# EAGLE board Electronics_Design_V2_v11 (EAGLE 9.7.0)
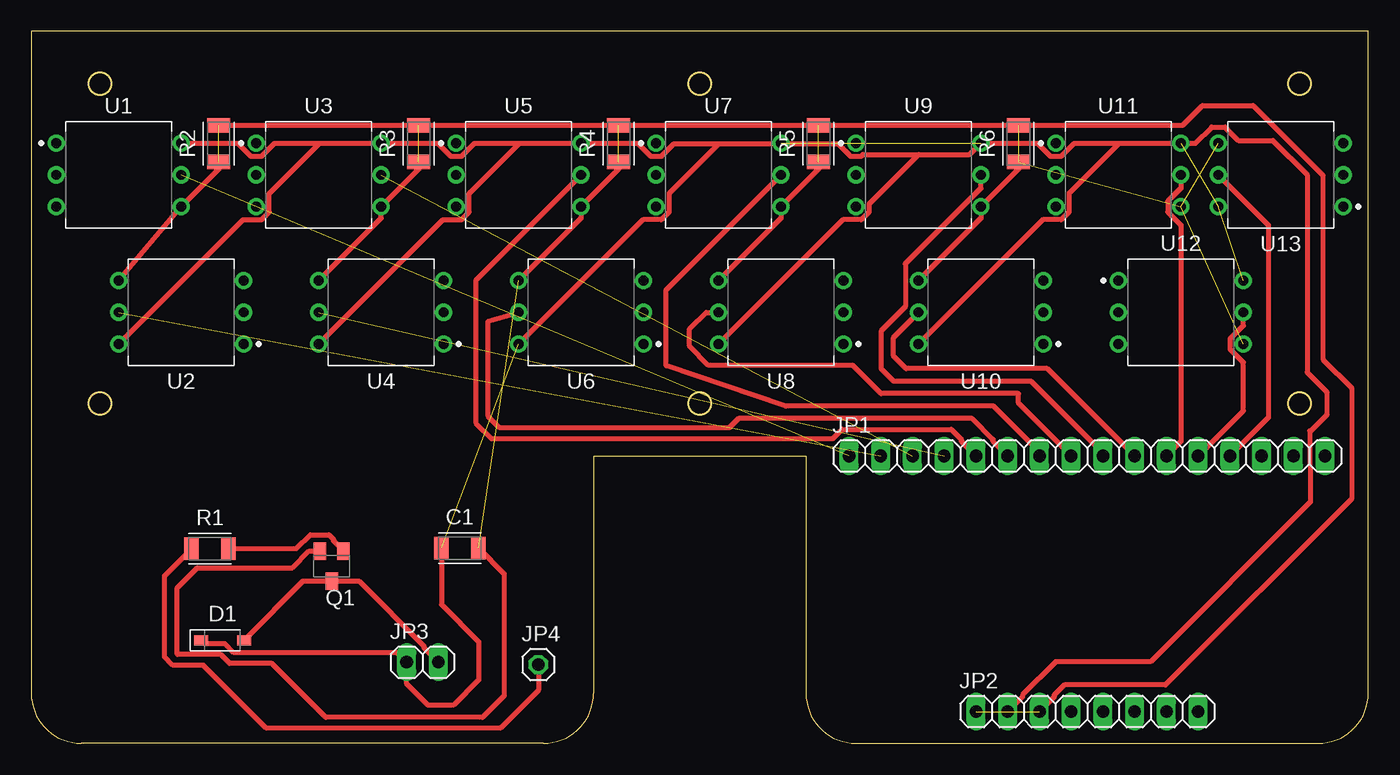
[diagram p0: board, top side]

Size 107 x 57 mm. Coordinates in mm from the lower left corner, seen from the top.
Outline: 45,23 62,23 62,4 arc90 66,0 103,0 arc90 107,4 107,57 0,57 0,4 arc90 4,0 41,0 arc90 45,4 45,23
Outline: circle at 101.5,52.8 radius 0.9
Outline: circle at 53.5,27.2 radius 0.9
Outline: circle at 101.5,27.2 radius 0.9
Outline: circle at 5.5,52.8 radius 0.9
Outline: circle at 5.5,27.2 radius 0.9
Outline: circle at 53.5,52.8 radius 0.9
Copper layers (1*16): Top 0.035mm / dielectric 1.5mm / Bottom 0.035mm
Design rules "default *": minimum track width 6mil, minimum drill 0.35mm, track to track 0.45mm, track to pad 0.4mm, pad to pad 0.4mm, via to via 0.4mm, smd to smd 0.4mm, copper to edge 40mil, drill to drill 6mil, minimum pad ring 10mil, minimum via ring 8mil, stop-mask expansion 4mil, vias tented up to drill 0mil, thermal gap 10mil

## Footprints (pad centres in the part's own frame; a part is rotated, then mirrored left to right if it is on the bottom)
CAPC3216X135 = smd 1.165 x 1.815: 1 -1.475,0; 2 1.475,0
SOD3715X135 = smd 1.127 x 0.784: 1 -1.722,0; 2 1.722,0
1X16 = drill 1.016 long: 1 -19.05,0; 2 -16.51,0; 3 -13.97,0; 4 -11.43,0; 5 -8.89,0; 6 -6.35,0; 7 -3.81,0; 8 -1.27,0; 9 1.27,0; 10 3.81,0; 11 6.35,0; 12 8.89,0; 13 11.43,0; 14 13.97,0; 15 16.51,0; 16 19.05,0
1X08 = drill 1.016 long: 1 -8.89,0; 2 -6.35,0; 3 -3.81,0; 4 -1.27,0; 5 1.27,0; 6 3.81,0; 7 6.35,0; 8 8.89,0
1X02 = drill 1.016 long: 1 -1.27,0; 2 1.27,0
1X01 = drill 1.016 octagon: 1 0,0
SC59 = smd 1 x 1.4: B -0.95,-1.2; C 0,1.2; E 0.95,-1.2
RESC3216X70 = smd 1.165 x 1.815: 1 -1.475,0; 2 1.475,0
DIP1000W53P254L850H340Q6B = drill 0.774 pad 1.374: 1 -5,2.54; 2 -5,0; 3 -5,-2.54; 4 5,-2.54; 5 5,0; 6 5,2.54

## Placement (x,y rotation side)
C1  [CAPC3216X135]  34.31,15.63 0 top
D1  1N4148W  [SOD3715X135]  15.31,8.25 0 top
JP1  PINHD-1X16  [1X16]  84.5,23 0 top
JP2  PINHD-1X8  [1X08]  84.5,2.54 0 top
JP3  PINHD-1X2  [1X02]  31.31,6.49 0 top
JP4  PINHD-1X1  [1X01]  40.58,6.3 0 top
Q1  NPN  [SC59]  24.04,14.19 180 top
R1  [RESC3216X70]  14.31,15.57 0 top
R2  [RESC3216X70]  15,48 90 top
R3  [RESC3216X70]  31,48 90 top
R4  [RESC3216X70]  47,48 90 top
R5  [RESC3216X70]  63,48 90 top
R6  [RESC3216X70]  79,48 90 top
U1  MPC15  [DIP1000W53P254L850H340Q6B]  7,45.5 0 top
U2  MPC15  [DIP1000W53P254L850H340Q6B]  12,34.5 180 top
U3  MPC15  [DIP1000W53P254L850H340Q6B]  23,45.5 0 top
U4  MPC15  [DIP1000W53P254L850H340Q6B]  28,34.5 180 top
U5  MPC15  [DIP1000W53P254L850H340Q6B]  39,45.5 0 top
U6  MPC15  [DIP1000W53P254L850H340Q6B]  44,34.5 180 top
U7  MPC15  [DIP1000W53P254L850H340Q6B]  55,45.5 0 top
U8  MPC15  [DIP1000W53P254L850H340Q6B]  60,34.5 180 top
U9  MPC15  [DIP1000W53P254L850H340Q6B]  71,45.5 0 top
U10  MPC15  [DIP1000W53P254L850H340Q6B]  76,34.5 180 top
U11  MPC15  [DIP1000W53P254L850H340Q6B]  87,45.5 0 top
U12  MPC15  [DIP1000W53P254L850H340Q6B]  92,34.5 0 top
U13  MPC15  [DIP1000W53P254L850H340Q6B]  100,45.5 180 top

## Library data of the parts
C1 = Capacitor; CATEGORY: Capacitor
D1 = Diode; CATEGORY: Diode; DESCRIPTION: DIODE GEN PURP 100V 300MA SOD123; MANUFACTURER: Diodes Incorporated; SUB-CATEGORY: Rectifier
JP1-JP4 = Connector; CATEGORY: CONNECTOR; SUB-CATEGORY: PIN-HEADER
Q1 = Transistor; CATEGORY: Transistor; SUB-CATEGORY: BJT; TYPE: NPN
R1-R6 = Resistor; CATEGORY: Resistor; SUB-CATEGORY: Fixed
U1-U13 = MPC15

## Nets
+5V: C1.1 D1.1 JP2.2 JP3.1 U1.6 U2.6 U3.6 U4.6 U5.6 U6.6 U7.6 U8.6 U9.6 U10.6 U11.6 U12.6 U13.6
GND: C1.2 JP2.1 JP2.3 Q1.E R2.1 R2.2 R3.1 R3.2 R4.1 R4.2 R5.1 R5.2 R6.1 R6.2 U1.4 U2.4 U3.4 U4.4 U5.4 U6.4 U7.4 U8.4 U9.4 U10.4 U11.4 U12.4 U13.4
N$1: JP1.1 U1.5
N$2: JP1.2 U2.5
N$3: JP1.3 U3.5
N$4: JP1.4 U4.5
N$5: JP1.5 U5.5
N$6: JP1.6 U6.5
N$7: JP1.7 U7.5
N$8: JP1.8 U8.5
N$9: JP1.9 U9.5
N$10: JP1.10 U10.5
N$11: JP1.11 U11.5
N$12: JP1.12 U12.5
N$13: JP1.13 U13.5
N$14: JP4.1 R1.1
N$15: Q1.B R1.2
N$17: D1.2 JP3.2 Q1.C

## Tracks (layer width: path | path; a pad name or v marks a point on that pad's centre or on a via)
+5V  (4 unrouted)
  Top 0.406: 23,48.04 U3.6 32.53,48.04 33.57,47 34.43,47 35.47,48.04 39,48.04 | 39,48.04 U5.6 48.53,48.04 49.57,47 50.43,47 51.43,48 55,48 | 71,47.12 75.08,47.12 U9.6 80.53,48.04 81.57,47 82.43,47 83.47,48.04 87,48.04 | 87,48.04 U11.6 93.17,48.04 94.47,49.33 95.53,49.33 96.61,48.26 99.37,48.26 102.11,45.52 102.11,29.7 103.69,28.11 103.69,26.29 102.41,25 102.31,25 102.36,19.3 89.6,6.54 82,6.54 79.33,3.87 79.33,3.71 JP2.2 | 23,48.04 23,47.96 19.04,44 19.04,42.53 18.43,41.92 16.96,41.92 U2.6 | 39,48.04 39,47.96 35.04,44 35.04,42.53 34.43,41.92 32.96,41.92 U4.6 | 55,48 55,47.96 51.04,44 51.04,42.53 50.43,41.92 48.96,41.92 U6.6 | 87,48.04 87,47.96 83.04,44 83.04,42.53 82.43,41.92 80.96,41.92 U10.6 | 71,47.12 67.04,43.17 67.04,42.53 66.43,41.92 64.96,41.92 U8.6 | 71,47.12 66.56,47.12 66.43,47 65.57,47 64.57,48 55,48 | U1.6 16.53,48.04 17.57,47 18.43,47 19.47,48.04 23,48.04 | C1.1 32.84,11.11 35.81,8.13 35.81,5.08 33.78,3.05 31.75,3.05 30.04,4.76 JP3.1 29.27,7.25 16.22,7.25 15.5,7.97 13.87,7.97 D1.1
GND  (10 unrouted)
  Top 0.406: U2.4 U1.4 15,45.96 R2.1 | U4.4 28,42.04 U3.4 31,45.96 R3.1 | U6.4 44,42.04 U5.4 47,45.96 R4.1 | U8.4 60,42.04 U7.4 63,45.96 R5.1 | U10.4 76,42.04 U9.4 79,45.96 R6.1 | R2.2 R3.2 R4.2 R5.2 R6.2 92.15,49.48 93.73,51.05 97.79,51.05 103.38,45.47 103.38,30.73 105.66,28.45 105.66,19.56 90.77,4.67 82.67,4.67 81.86,3.87 81.86,3.71 JP2.3 | C1.2 37.85,13.57 37.85,3.81 36.11,2.08 23.58,2.08 19.26,6.4 15.86,6.4 15.15,7.11 11.68,7.11 11.68,12.45 13.3,14.06 20.92,14.06 22.25,15.39 Q1.E
N$1  (1 unrouted)
N$2  (1 unrouted)
N$3  (1 unrouted)
N$4  (1 unrouted)
N$5
  Top 0.406: U5.5 35.56,37.06 35.56,25.65 36.83,24.38 64.14,24.38 64.89,25.13 73.64,25.13 74.44,24.33 74.44,24.18 JP1.5
N$6
  Top 0.406: JP1.6 76.97,24.18 76.97,24.33 75.32,25.98 56.6,25.98 55.85,25.24 37.5,25.24 36.58,26.16 36.58,33.78 U6.5
N$7
  Top 0.406: JP1.7 80.69,23.31 77,27 60.38,27 50.8,30.23 50.8,36.3 U7.5
N$8
  Top 0.406: JP1.8 79,27.23 79,28 68,28 65.75,30.25 54.22,30.25 52.69,31.78 52.69,33.19 54,34.5 U8.5
N$9
  Top 0.406: JP1.9 85.77,23.23 80,29 69,29 68,30 68,33 69.96,34.96 69.96,38.39 76,44.43 U9.5
N$10
  Top 0.406: U10.5 69,32.5 69,31 70,30 81.31,30 JP1.10
N$11
  Top 0.406: JP1.11 92,24.15 92,41.49 90.96,42.53 90.96,43.39 92,44.43 U11.5
N$12
  Top 0.406: JP1.12 97,26.61 97,30.49 95.96,31.53 95.96,32.39 97,33.43 U12.5
N$13
  Top 0.406: U13.5 99,41.5 99,26.07 JP1.13
N$14
  Top 0.406: R1.1 10.67,13.4 10.67,6.92 11.33,6.26 13.77,6.26 18.81,1.22 37.54,1.22 40.58,4.26 JP4.1
N$15
  Top 0.406: R1.2 21.22,15.57 22.34,16.69 23.84,16.69 24.19,16.34 24.19,16.19 Q1.B
N$17
  Top 0.406: D1.2 21.77,12.99 Q1.C 26.23,12.99 31.41,7.82 31.41,7.67 JP3.2